# EAGLE board exo_sequencer_back (EAGLE 8.0.0)
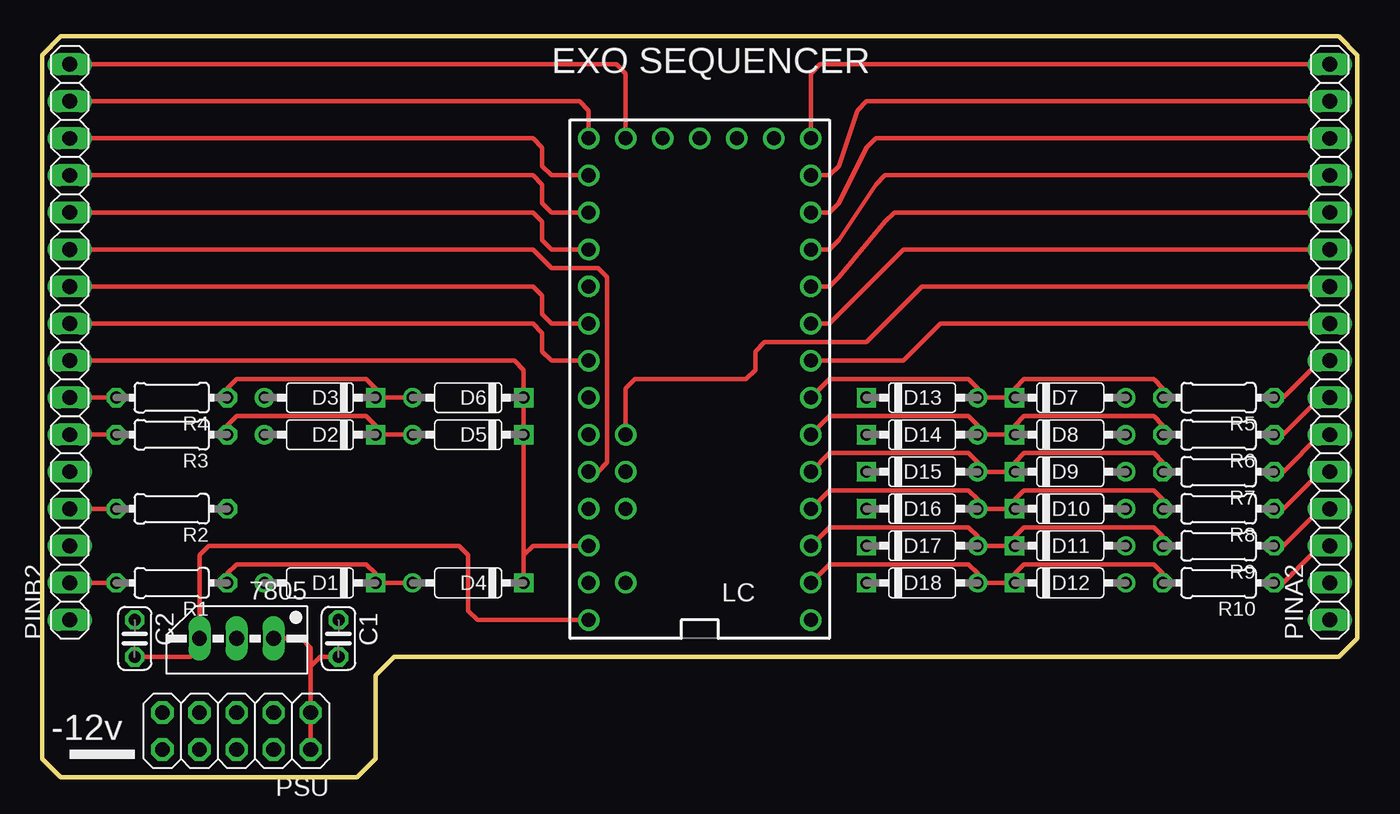
[diagram p0: board, top side]
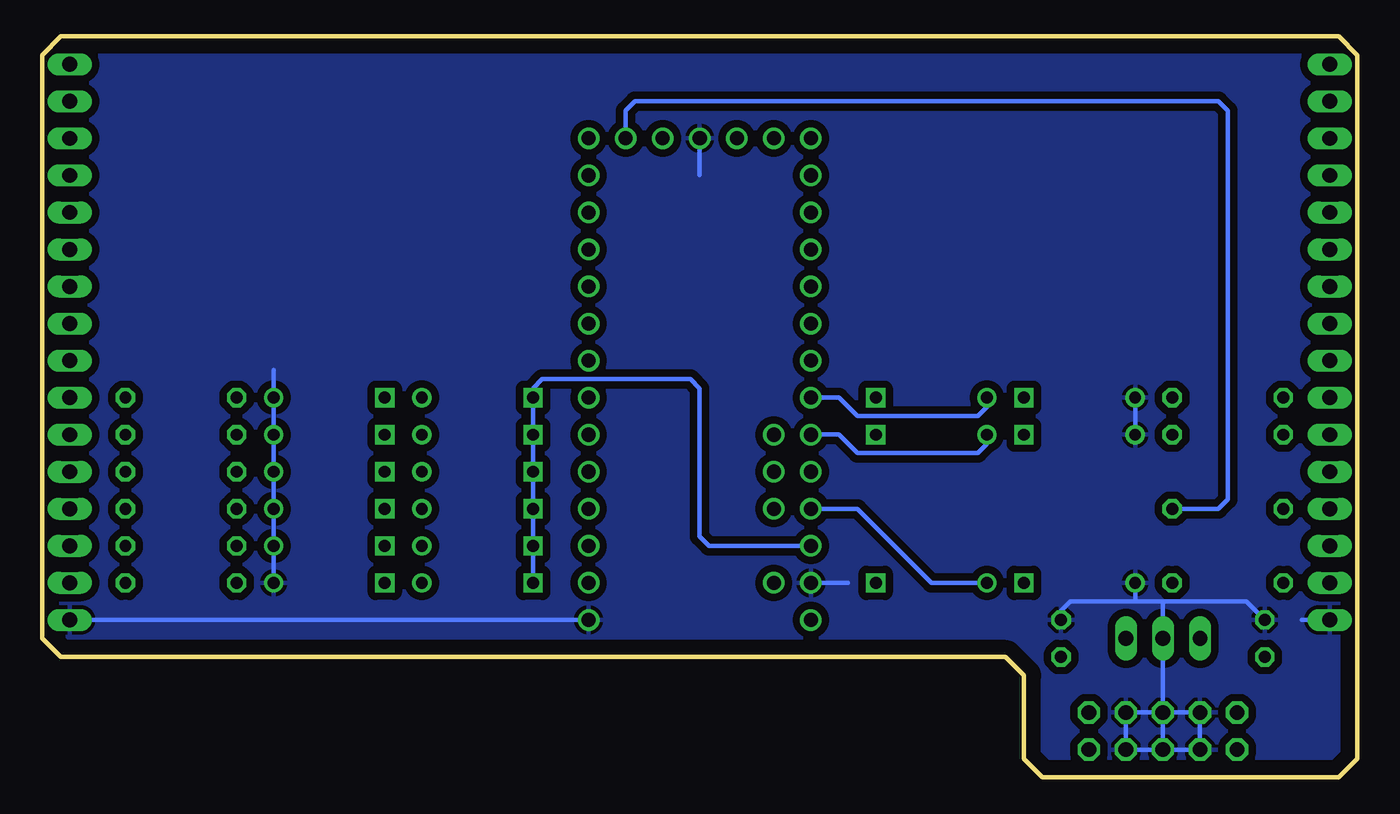
[diagram p1: board, bottom side, seen from below]

Size 90.17 x 50.8 mm. Coordinates in mm from the lower left corner, seen from the top.
Outline: 0,49.53 0,1.27 1.27,0 21.59,0 22.86,1.27 22.86,6.99 24.13,8.26 88.9,8.26 90.17,9.53 90.17,49.53 88.9,50.8 1.27,50.8 0,49.53
Copper layers (1*16): Top 0.035mm / dielectric 1.5mm / Bottom 0.035mm
Design rules "default": minimum track width 10mil, minimum drill 24mil, track to track 8mil, track to pad 8mil, pad to pad 8mil, via to via 8mil, smd to smd 8mil, copper to edge 40mil, drill to drill 8mil, minimum pad ring 10mil, minimum via ring 8mil, stop-mask expansion 4mil, vias tented up to drill 0mil, thermal gap 10mil

## Footprints (pad centres in the part's own frame; a part is rotated, then mirrored left to right if it is on the bottom)
78MXXS = drill 1.016 long: GND 0,-2.54; IN -2.54,-2.54; OUT 2.54,-2.54
C025-024X044 = drill 0.813 octagon: 1 -1.27,0; 2 1.27,0
DO35-7 = drill 0.813: A 3.81,0 | drill 0.813 square: C -3.81,0
TEENSY_3.0-3.2&LC_ALL_PINS = drill 0.965: 0 -7.62,13.97; 1 -7.62,11.43; 2 -7.62,8.89; 3 -7.62,6.35; 3.3V 7.62,11.43; 3.3V1 -2.54,-16.51; 4 -7.62,3.81; 5 -7.62,1.27; 6 -7.62,-1.27; 7 -7.62,-3.81; 8 -7.62,-6.35; 9 -7.62,-8.89; 10 -7.62,-11.43; 11 -7.62,-13.97; 12 -7.62,-16.51; 13 7.62,-16.51; 14/A0 7.62,-13.97; 15/A1 7.62,-11.43; 16/A2 7.62,-8.89; 17/A3 7.62,-6.35; 18/A4 7.62,-3.81; 19/A5 7.62,-1.27; 20/A6 7.62,1.27; 21/A7 7.62,3.81; 22/A8 7.62,6.35; 23/A9 7.62,8.89; A10 5.08,6.35; A11 5.08,3.81; AGND 7.62,13.97; AREF 5.08,8.89; GND -7.62,16.51; GND1 0,-16.51; PGM 2.54,-16.51; RESET/DAC 5.08,-16.51; VBAT -5.08,-16.51; VIN 7.62,16.51; VUSB 5.08,13.97
1X16 = drill 1.016 long: 1 -19.05,0; 2 -16.51,0; 3 -13.97,0; 4 -11.43,0; 5 -8.89,0; 6 -6.35,0; 7 -3.81,0; 8 -1.27,0; 9 1.27,0; 10 3.81,0; 11 6.35,0; 12 8.89,0; 13 11.43,0; 14 13.97,0; 15 16.51,0; 16 19.05,0
2X05 = drill 1.016 octagon: 1 -5.08,-1.27; 2 -5.08,1.27; 3 -2.54,-1.27; 4 -2.54,1.27; 5 0,-1.27; 6 0,1.27; 7 2.54,-1.27; 8 2.54,1.27; 9 5.08,-1.27; 10 5.08,1.27
0204/7 = drill 0.813 octagon: 1 -3.81,0; 2 3.81,0

## Placement (x,y rotation side)
7805  [78MXXS]  13.33,6.99 180 top
C1  [C025-024X044]  20.32,9.53 270 top
C2  [C025-024X044]  6.35,9.53 270 top
D1  [DO35-7]  19.05,13.34 180 top
D2  [DO35-7]  19.05,23.5 180 top
D3  [DO35-7]  19.05,26.04 180 top
D4  [DO35-7]  29.21,13.34 180 top
D5  [DO35-7]  29.21,23.5 180 top
D6  [DO35-7]  29.21,26.04 180 top
D7  [DO35-7]  70.48,26.04 0 top
D8  [DO35-7]  70.48,23.5 0 top
D9  [DO35-7]  70.48,20.95 0 top
D10  [DO35-7]  70.48,18.41 0 top
D11  [DO35-7]  70.48,15.88 0 top
D12  [DO35-7]  70.48,13.34 0 top
D13  [DO35-7]  60.32,26.04 0 top
D14  [DO35-7]  60.32,23.5 0 top
D15  [DO35-7]  60.32,20.95 0 top
D16  [DO35-7]  60.32,18.41 0 top
D17  [DO35-7]  60.32,15.88 0 top
D18  [DO35-7]  60.32,13.34 0 top
LC  [TEENSY_3.0-3.2&LC_ALL_PINS]  45.09,27.3 180 top
PINA2  [1X16]  88.27,29.84 90 top
PINB2  [1X16]  1.91,29.84 90 top
PSU  [2X05]  13.33,3.17 180 top
R1  [0204/7]  8.89,13.34 180 top
R2  [0204/7]  8.89,18.41 180 top
R3  [0204/7]  8.89,23.5 180 top
R4  [0204/7]  8.89,26.04 180 top
R5  [0204/7]  80.65,26.04 180 top
R6  [0204/7]  80.65,23.5 180 top
R7  [0204/7]  80.65,20.95 180 top
R8  [0204/7]  80.65,18.41 180 top
R9  [0204/7]  80.65,15.88 180 top
R10  [0204/7]  80.65,13.34 180 top

## Library data of the parts
7805 = v-reg
C1 C2 R1-R10 = rcl
D1-D18 = MusicThingModular
LC = Teensy_3_and_LC_Series_Boards_v1.4
PINA2 PINB2 PSU = pinhead

## Nets
3V: D4.C D5.C D6.C D18.C LC.3.3V PINB2.8
G2: C1.1 C2.1 D1.A D2.A D3.A D12.A LC.AGND LC.GND LC.GND1 PINA2.1 PINB2.1 PSU.3 PSU.4 PSU.5 PSU.6 PSU.7 PSU.8
S$2: 7805.IN C1.2
S$84: LC.14/A0 PINB2.14
S$85: LC.15/A1 PINB2.13
S$86: LC.19/A5 PINB2.9
S$87: LC.16/A2 PINB2.12
S$88: LC.22/A8 PINB2.11
S$89: LC.18/A4 PINB2.10
S$90: C2.2 LC.VIN
S$95: LC.8 PINA2.12
S$96: LC.7 PINA2.11
S$97: PINA2.3 R10.1
S$98: D10.C D16.A LC.2 R8.2
S$99: D9.C D15.A LC.3 R7.2
S$100: LC.RESET/DAC PINB2.16
S$101: LC.13 PINB2.15
S$103: PINB2.7 R4.2
S$104: D3.C D6.A LC.20/A6 R4.1
S$105: R3.2
S$106: D2.C D5.A LC.21/A7 R3.1
S$107: D1.C D4.A LC.23/A9 R1.1
S$108: R1.2
S$109: LC.VBAT R2.1
S$110: PINB2.4 R2.2
S$112: LC.12 PINA2.16
S$113: LC.11 PINA2.15
S$114: LC.10 PINA2.14
S$115: LC.9 PINA2.13
S$116: LC.6 PINA2.9
S$117: D7.C D13.A LC.5 R5.2
S$118: D11.C D17.A LC.1 R9.2
S$119: D8.C D14.A LC.4 R6.2
S$120: D12.C D18.A LC.0 R10.2
S$121: PINA2.4 R9.1
S$122: PINA2.5 R8.1
S$123: PINA2.6 R7.1
S$124: PINA2.7 R6.1
S$125: PINA2.8 R5.1
S$126: LC.A11 PINA2.10

## Tracks (layer width: path | path; a pad name or v marks a point on that pad's centre or on a via)
3V
  Top 0.305: LC.3.3V 33.66,15.88 33.02,15.24 | 33.02,15.24 D4.C | 33.02,15.24 D5.C 33.02,25.4 D6.C 33.02,27.94 32.38,28.57 PINB2.8
  Bottom 0.305: D18.C 56.52,26.67 55.88,27.3 45.72,27.3 45.09,26.67 45.09,16.51 44.45,15.88 LC.3.3V
G2
  Bottom 0.305: D3.A D2.A | LC.GND PINA2.1 | LC.GND1 45.09,41.27 | LC.AGND 34.92,13.34 | D12.A 74.3,27.94 | PSU.6 PSU.4 PSU.3 PSU.5 | PSU.6 PSU.5 | PSU.5 PSU.7 PSU.8 PSU.6 | 13.33,12.06 PSU.5 | PINB2.1 3.81,10.79 | C2.1 7.62,12.06 13.33,12.06 | C1.1 20.32,11.43 19.69,12.06 15.24,12.06 | 15.24,12.06 13.33,12.06 | D1.A 15.24,12.06
  pour Bottom (isolate 0.508): 0,50.8 90.17,50.8 90.17,0 0,0
S$2
  Top 0.305: 18.42,1.27 18.42,7.62 | 18.42,7.62 19.05,8.26 C1.2 | 18.42,7.62 18.42,8.89 17.78,9.53 7805.IN
S$84
  Top 0.305: LC.14/A0 34.92,41.27 34.29,41.91 34.29,43.18 33.66,43.81 PINB2.14
S$85
  Top 0.305: LC.15/A1 34.92,38.73 34.29,39.37 34.29,40.64 33.66,41.27 PINB2.13
S$86
  Top 0.305: PINB2.9 33.66,31.11 34.29,30.48 34.29,29.21 34.92,28.57 LC.19/A5
S$87
  Top 0.305: PINB2.12 33.66,38.73 34.29,38.1 34.29,36.83 34.92,36.2 LC.16/A2
S$88
  Top 0.305: PINB2.11 33.66,36.2 34.92,34.92 38.1,34.92 38.73,34.29 38.73,21.59 38.1,20.95 LC.22/A8
S$89
  Top 0.305: PINB2.10 33.66,33.66 34.29,33.02 34.29,31.75 34.92,31.11 LC.18/A4
S$90
  Top 0.305: LC.VIN 29.85,10.79 29.21,11.43 29.21,15.24 28.58,15.88 11.43,15.88 10.79,15.24 10.79,8.89 10.16,8.26 C2.2
S$95
  Top 0.305: LC.8 53.98,33.66 54.61,34.29 57.78,38.1 58.42,38.73 PINA2.12
S$96
  Top 0.305: LC.7 53.98,31.11 59.05,36.2 PINA2.11
S$97
  Top 0.305: R10.1 85.09,13.34 87.63,15.88 PINA2.3
S$98
  Top 0.305: R8.2 76.84,19.05 76.2,19.68 67.31,19.68 66.68,19.05 D10.C D16.A 64.14,19.05 63.5,19.68 53.98,19.68 LC.2
S$99
  Top 0.305: R7.2 76.84,21.59 76.2,22.23 67.31,22.23 66.68,21.59 D9.C D15.A 64.14,21.59 63.5,22.23 53.98,22.23 LC.3
S$100
  Top 0.305: LC.RESET/DAC 40,48.26 39.37,48.9 PINB2.16
S$101
  Top 0.305: LC.13 37.46,45.72 36.83,46.35 PINB2.15
S$103
  Top 0.305: PINB2.7 R4.2
S$104
  Top 0.305: R4.1 12.7,26.67 13.33,27.3 22.23,27.3 22.86,26.67 D3.C D6.A
  Bottom 0.305: D6.A 25.4,25.4 26.04,24.77 34.29,24.77 35.56,26.04 LC.20/A6
S$105
  Top 0.305: 1.91,23.5 R3.2
S$106
  Top 0.305: R3.1 12.7,24.13 13.33,24.77 22.23,24.77 22.86,24.13 D2.C D5.A
  Bottom 0.305: D5.A 25.4,22.86 26.04,22.23 34.29,22.23 35.56,23.5 LC.21/A7
S$107
  Top 0.305: R1.1 12.7,13.97 13.33,14.61 22.23,14.61 22.86,13.97 D1.C D4.A
  Bottom 0.305: LC.23/A9 34.29,18.41 29.21,13.34 D4.A
S$108
  Top 0.305: 1.91,13.34 R1.2
S$109
  Bottom 0.305: LC.VBAT 50.16,45.72 49.53,46.35 9.53,46.35 8.89,45.72 8.89,19.05 9.53,18.41 R2.1
S$110
  Top 0.305: PINB2.4 R2.2
S$112
  Top 0.305: PINA2.16 53.34,48.9 52.7,48.26 LC.12
S$113
  Top 0.305: LC.11 53.98,41.27 54.61,41.91 55.88,45.72 56.52,46.35 PINA2.15
S$114
  Top 0.305: LC.10 53.98,38.73 54.61,39.37 56.52,43.18 57.15,43.81 PINA2.14
S$115
  Top 0.305: LC.9 53.98,36.2 54.61,36.83 57.15,40.64 57.78,41.27 PINA2.13
S$116
  Top 0.305: LC.6 59.05,28.57 61.59,31.11 PINA2.9
S$117
  Top 0.305: R5.2 76.84,26.67 76.2,27.3 67.31,27.3 66.68,26.67 D7.C D13.A 64.14,26.67 63.5,27.3 53.98,27.3 LC.5
S$118
  Top 0.305: R9.2 76.84,16.51 76.2,17.14 67.31,17.14 66.68,16.51 D11.C D17.A 64.14,16.51 63.5,17.14 53.98,17.14 LC.1
S$119
  Top 0.305: R6.2 76.84,24.13 76.2,24.77 67.31,24.77 66.68,24.13 D8.C D14.A 64.14,24.13 63.5,24.77 53.98,24.77 LC.4
S$120
  Top 0.305: R10.2 76.84,13.97 76.2,14.61 67.31,14.61 66.68,13.97 D12.C D18.A 64.14,13.97 63.5,14.61 53.98,14.61 LC.0
S$121
  Top 0.305: R9.1 85.09,15.88 87.63,18.41 PINA2.4
S$122
  Top 0.305: R8.1 85.09,18.41 87.63,20.95 PINA2.5
S$123
  Top 0.305: R7.1 85.09,20.95 87.63,23.5 PINA2.6
S$124
  Top 0.305: R6.1 85.09,23.5 87.63,26.04 PINA2.7
S$125
  Top 0.305: R5.1 85.09,26.04 87.63,28.57 PINA2.8
S$126
  Top 0.305: LC.A11 40,26.67 40.64,27.3 48.26,27.3 48.89,27.94 48.89,29.21 49.53,29.84 56.52,29.84 60.32,33.66 PINA2.10

## Text on the board
tNames: EXO SEQUENCER | -12v